# Altium PCB RF Demo.PcbDoc
Units mil, origin at the board's own origin, x right, y up, seen from the top; angles counter-clockwise.
Board outline 1114.53 x 748.46 mil, 2 copper layers (Top Layer, Bottom Layer), stack 11.024 mil thick; 18 components, 17 nets, 60 pads, 78 vias.
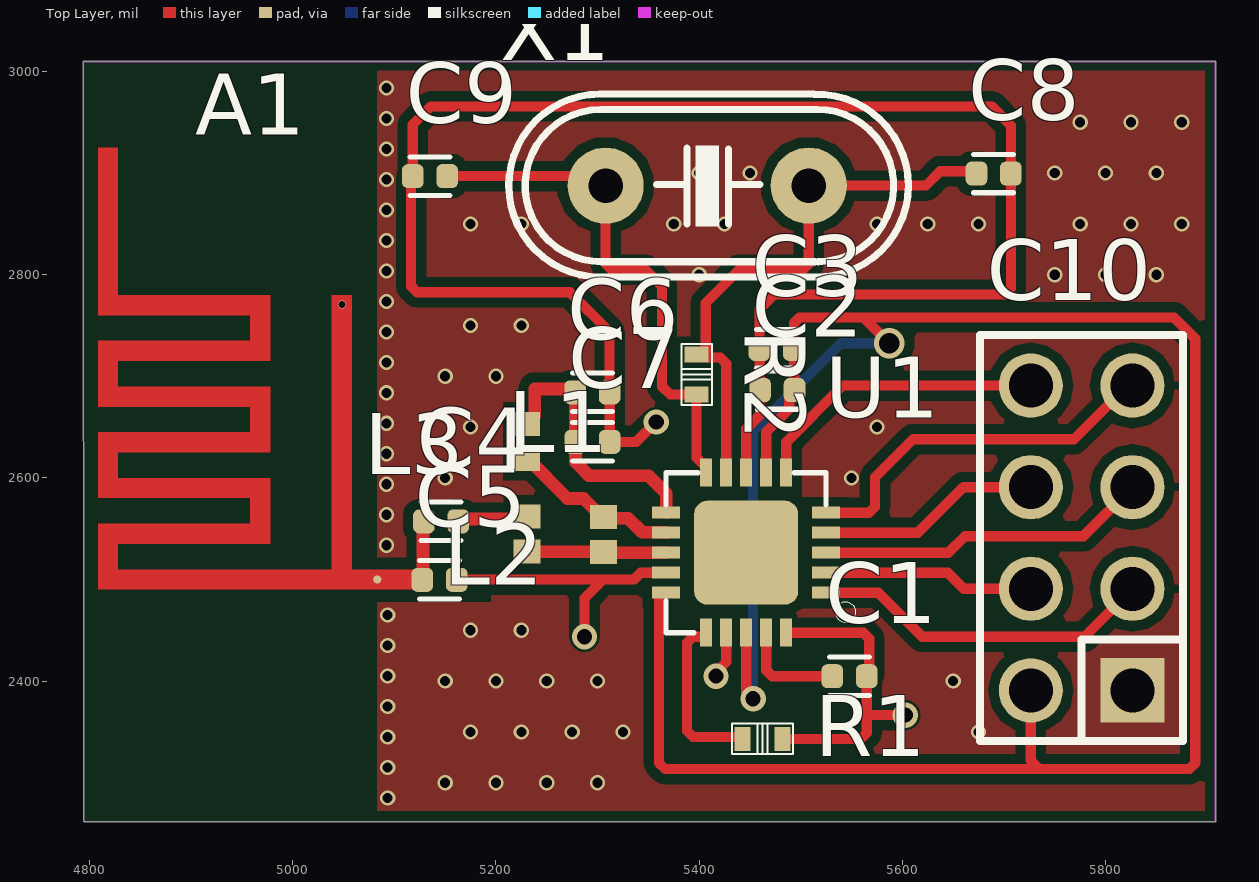
[diagram p0: Top Layer view]
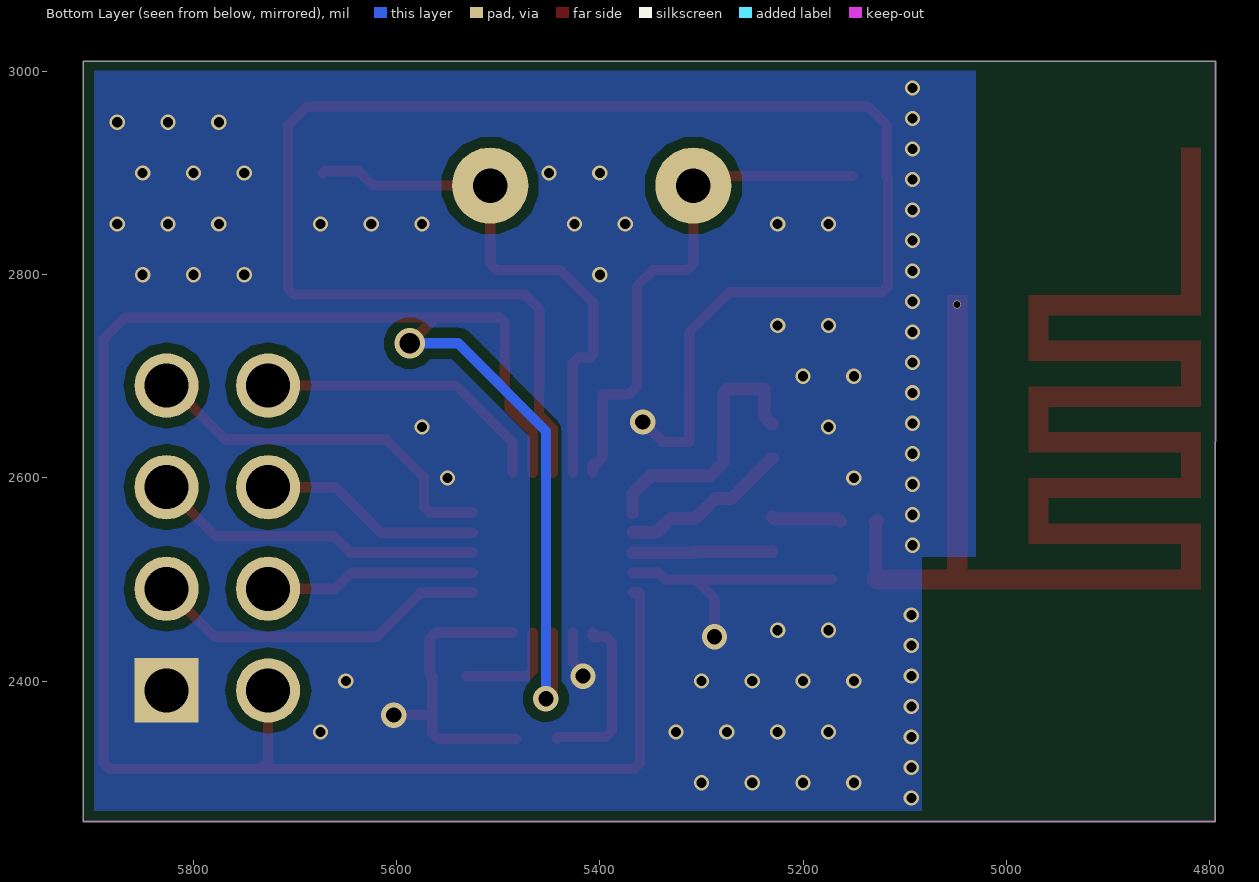
[diagram p1: Bottom Layer view, seen from below]
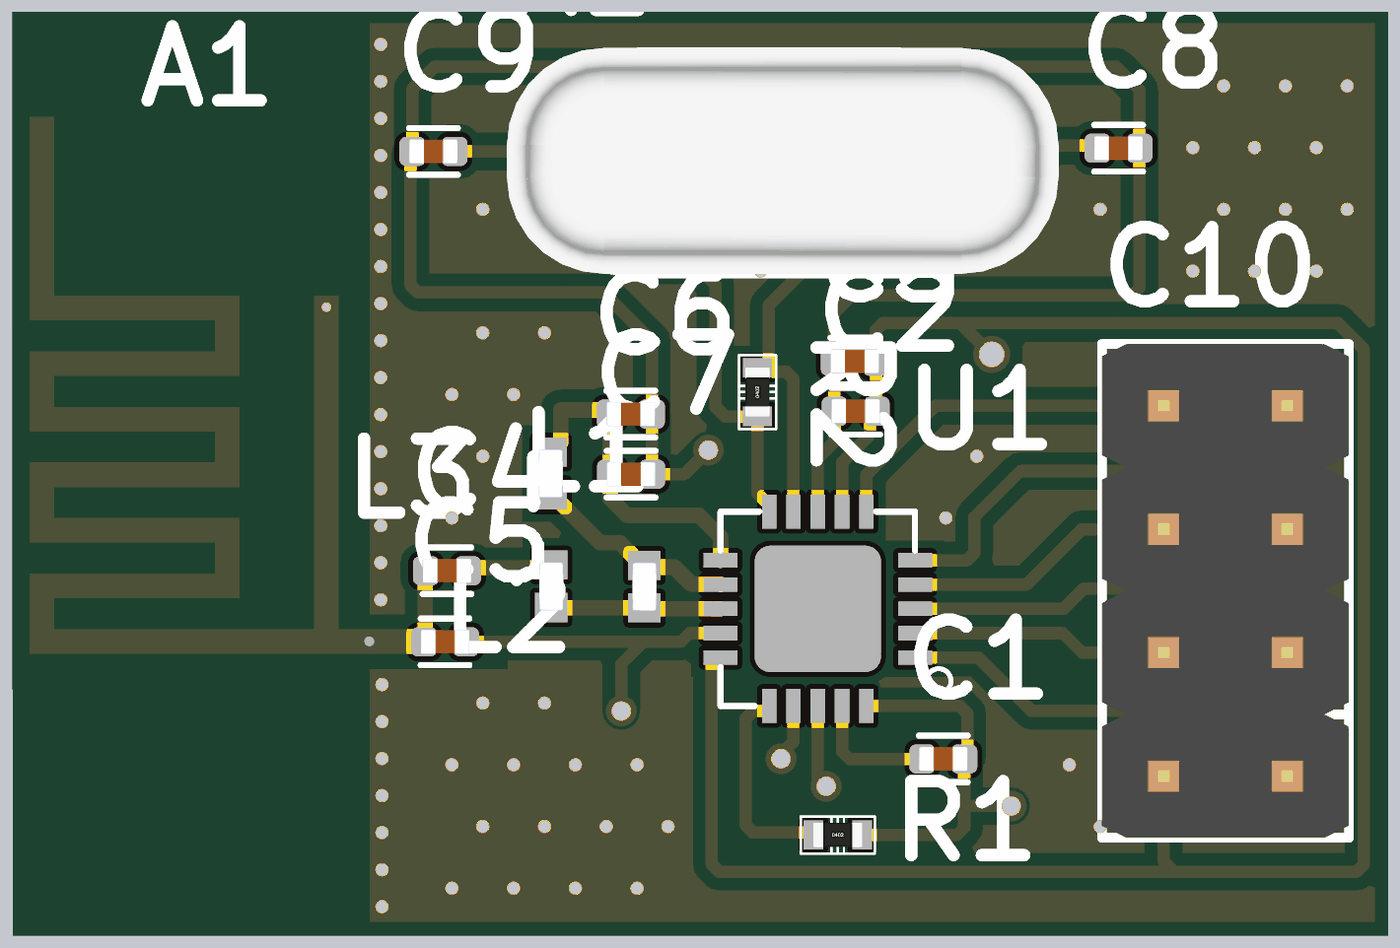
[diagram p2: 3D render of the assembled board from above, using the file's embedded part models]

## Layer stack, top to bottom
Top Solder: solder mask 0.4, Solder Resist, Dk 3.5
Top Layer: signal copper 1.575
Dielectric 1: dielectric 7.874, FR-4, Dk 4.8
Bottom Layer: signal copper 1.575
Bottom Solder: solder mask 0.4, Solder Resist, Dk 3.5

## Board outline
4794.37,2261.58 5907.88,2261.58 5908.39,2262.1 5908.39,3009.52 5907.88,3010.04 4794.37,3010.04 4793.86,3009.52

## Design rules (kind name [scope] priority, off if disabled: settings)
Clearance [All] p1: gap=10 ignorepadtopadclearanceinfootprint=FALSE except(0: Arc-Hole Track-Hole SMDPad-Hole THPad-Hole Via-Hole Fill-Hole Poly-Hole Region-Hole Text-Hole)
PolygonConnect [All] p1: connectstyle=Direct reliefconductorwidth=10 reliefentries=4 polygonreliefangle="90 Angle" airgapwidth=10
RoutingVias [All] p1: holewidth=28 width=35 viastyle="Through Hole" minholewidth=28 minwidth=50 maxholewidth=28 maxwidth=50
SolderMaskExpansion [All] p1: expansion=4 istentingtop=FALSE
Width RF [InNetClass('RF')] p1: maxlimit=12.6 minlimit=12.6 preferedwidth=12.6 impedanceprofiledriven=TRUE impedanceprofileid={A08E1E66-7839-45F7-B785-0C6D9C89D226} impedanceprofilevalue=50.000000 minimp=50.000000 maximp=50.000000 favimp=50.000000 // RF Impedance
Width [All] p2: maxlimit=10 minlimit=10 preferedwidth=10
30 further rules are at their usual default settings.

## Classes and differential pairs
net class RF: NetC4_2 NetC6_1 NetL1_1 NetL2_1 "RF I/O"

## Components (designator, comment, footprint, x,y, rotation, side; value= is the part's Value field where it differs from the comment)
A1 "F Antena" "F Antena NRF24L" 5088.16,2490.03 r90 top net-tie
C1 "33nF" "Capacitor 0402" 5548,2404.76 r0 top value=103
C2 "10nF" "Capacitor 0402" 5476.99,2686.48 r0 top value=103
C3 "10nF" "Capacitor 0402" 5476.32,2727.02 r0 top value=103
C4 "1.5pF" "Capacitor 0402" 5146.09,2557.22 r0 top value=103
C5 "1pF" "Capacitor 0402" 5144.53,2499.61 r0 top value=103
C6 "2.2nF" "Capacitor 0402" 5294.97,2684.16 r0 top value=103
C7 "4.7pF" "Capacitor 0402" 5295.15,2635.45 r0 top value=103
C8 "22pF" "Capacitor 0402" 5689.83,2899.57 r180 top value=103
C9 "22pnF" "Capacitor 0402" 5135.12,2896.98 r0 top value=103
C10 "JP4x2" JP4-D2T 5776.45,2540.87 r90 top
L1 "3.9uH" "Inductor 0402" 5230.47,2544.62 r90 top value="150 mH"
L2 "8.2nH" "Inductor 0402" 5305.98,2544.28 r270 top value="150 mH"
L3 "2.7nH" "Inductor 0402" 5230.04,2636.04 r90 top value="150 mH"
R1 "22k" RES-SMD-0402 5462.49,2343.12 r0 top value="R1/4W - 1K"
R2 "1M" RES-SMD-0402 5397.49,2702 r90 top value="R1/4W - 1K"
U1 "NRF24L01" NRF24l01 5446.32,2526.36 r180 top
X1 "16Mhz" XT2 5407.92,2887.76 r180 top value=4Mhz

## Footprints (in the part's own frame and the unit in brackets; to place one, negate y for a bottom-side part, rotate by r counter-clockwise, add the part's x,y. Pads: shape width x height; smd on the part's side, far side on the other; paste and mask are expansions set on the pad)
"Capacitor 0402" [mm]
  rrect53% 0.54x0.6 smd: 1(-0.431,0) 2(0.429,0)
  silkscreen extent -0.5,-0.48 0.5,0.48, body extent -0.5,-0.25 0.5,0.25, height 0.55
"F Antena NRF24L" [mil]
  round 8 smd mask+4: 1(10,5)
  Top Layer region: 0,0 20,0 20,280 0,280
  Top Layer region: 0,260 65,260 65,280 0,280
  Top Layer region: 45,110 65,110 65,280 45,280
  Top Layer region: 45,110 110,110 110,130 45,130
  Top Layer region: 90,110 110,110 110,280 90,280
  Top Layer region: 90,260 155,260 155,280 90,280
  Top Layer region: 135,110 155,110 155,280 135,280
  Top Layer region: 135,110 200,110 200,130 135,130
  Top Layer region: 180,110 200,110 200,280 180,280
  Top Layer region: 180,260 245,260 245,280 180,280
  Top Layer region: 225,110 245,110 245,280 225,280
  Top Layer region: 225,110 290,110 290,130 225,130
  Top Layer region: 270,110 290,110 290,280 270,280
  Top Layer region: 270,260 435,260 435,280 270,280
  Top Layer region: 0,30 290,30 290,50 0,50
"Inductor 0402" [mm]
  rect 0.6x0.67 smd: 1(-0.437,0) 2(0.437,0)
  body extent -0.5,-0.25 0.5,0.25, height 0.25
JP4-D2T [mm] "8 pins, dual pin, straight, gold plating"
  rect 1.61x1.6 hole 1.1: 1(-3.81,-1.27)
  oval 1.61x1.6 hole 1.1: 2(-1.27,-1.27) 3(1.27,-1.27) 4(3.81,-1.27) 5(3.81,1.27) 6(1.27,1.27) 7(-1.27,1.27) 8(-3.81,1.27)
  silkscreen extent -5.08,-2.54 5.08,2.54, body extent -5.08,-2.54 5.08,2.54, height 8.55
NRF24l01 [mm]
  rect 0.7x0.3 smd: 1(-2,1) 2(-2,0.5) 3(-2,0) 4(-2,-0.5) 5(-2,-1) 11(2,-1) 12(2,-0.5) 13(2,0) 14(2,0.5) 15(2,1)
  rect 0.3x0.7 smd: 6(-1,-2) 7(-0.5,-2) 8(0,-2) 9(0.5,-2) 10(1,-2) 16(1,2) 17(0.5,2) 18(0,2) 19(-0.5,2) 20(-1,2)
  rrect25% 2.6x2.6 smd: PAD(0,0)
  silkscreen extent -2.74,-2 2,2
RES-SMD-0402 [mm]
  rect 0.4x0.6 smd: 1(-0.5,0) 2(0.5,0)
  silkscreen extent -0.76,-0.38 0.76,0.38, body extent -0.5,-0.25 0.5,0.25, height 0.35
XT2 [mil] "Footpin for Crystal 2 pin"
  round 75 hole 34: 1(-100,0) 2(100,0)
  silkscreen extent -198,-90 195,90, body extent -233,-93 213,90, height 138

## Part data
A1: "F Antena MIFA"
C1 C2 C3 C4 C5 C6 C7 C8 C9: library part CM, "Cap SMD"
C10: "WR-PHD 2.54 mm Dual Socket Header", Manufacturer="W¨¹rth Elektronik eiSos GmbH", partNo=61300821821, ComponentLink1 Description=Manufacturer, ComponentLink1URL=http://www.we-online.com, ComponentLink2 Description=Datasheet, ComponentLink2URL=http://katalog.we-online.de/em/datasheet/6130xx21821.pdf, Created by="Karrer Zheng", Created Date="29 March 2013", NoPins=08
L1 L2 L3: library part L1, "Inductor"
R1 R2: library part R, "Resistor 1/4W"
X1: library part XT2, "Crystal For all Crystal 2pin."

## Via types
v1: diameter 15, hole 10, Top Layer to Bottom Layer, tented both sides, 71 vias
v2: diameter 25, hole 15, Top Layer to Bottom Layer, tented both sides, 5 vias
v3: diameter 8, hole 7, Top Layer to Bottom Layer, tented both sides, 1 vias
v4: diameter 30, hole 20, Top Layer to Bottom Layer, tented both sides, 1 vias

## Nets (pads, with @x,y where several pads share a name; then routed paths per layer and width w, separated by ;. In a path a pad name is that pad's centre, name@x,y a point inside that pad or via, vN(x,y) a via of type N, cw(c..) or ccw(c..) an arc to the next point about the centre after c; other vN are vias at no path point)
3.3V: C2.2 C3.2 C10.8 U1.7 U1.15 U1.18 | length 2308.1
  Top Layer w10: U1.15 5361.36,2486.99 5360.45,2486.08 5360.45,2319.27 5366.31,2313.41 5734.88,2313.41 ; U1.18 5446.32,2389.41 v2(5453.1,2382.63) ; U1.7 5466.01,2645.14 5488.64,2667.77 5488.64,2681.27 C2.2 5493.54,2686.84 5493.54,2726.7 C3.2 5493.2,2752.17 5499.06,2758.02 5561.65,2758.02 ; v4(5587.16,2732.51) 5561.65,2758.02 ; C10.8 5726.45,2321.84 5734.88,2313.41 ; 5561.65,2758.02 5867.27,2758.02 5888.35,2736.95 5888.35,2319.27 5882.49,2313.41 5734.88,2313.41
  Bottom Layer w10: v2(5453.1,2382.63) 5453.1,2646.15 5539.47,2732.51 v4(5587.16,2732.51)
CE: C10.2 U1.1 | length 338.9
  Top Layer w10: U1.1 5576.25,2486.99 5619.56,2443.67 5779.25,2443.67 C10.2
CSN: C10.7 U1.2 | length 207.9
  Top Layer w10: U1.2 5644.67,2506.68 5660.48,2490.87 C10.7
GND: C1.2 C2.1 C3.1 C5.2 C6.2 C7.2 C8.1 C9.1 C10.1 R1.2 U1.8 U1.14 U1.17 U1.20 | length 2334.4
  Top Layer w10: C5.2@5171.55,2499.87 5305.35,2499.87 ; v2(5287.15,2443.59) 5287.15,2481.67 5305.35,2499.87 ; v2(5357.66,2654.99) 5338.15,2635.47 C7.2 5311.94,2635.56 5311.94,2684.09 C6.2 5311.85,2743.54 5272.63,2782.77 5122.34,2782.77 5116.49,2788.62 5116.49,2895.33 C9.1 5118.15,2947.8 5136.03,2965.68 5687.95,2965.68 5706.8,2946.83 C8.1 5706.8,2786.28 5700.94,2780.42 5473.63,2780.42 5459.35,2766.13 C3.1 5459.68,2726.7 5459.68,2686.84 C2.1 5460.02,2662.22 5446.32,2648.52 U1.8 ; U1.14 5342.52,2506.68 5335.71,2499.87 5305.35,2499.87 ; v2(5416.56,2404.92) 5416.56,2408.77 5426.64,2418.84 U1.17 ; R1.2 5559.03,2343.12 5564.89,2348.98 5564.89,2364.58 ; U1.20 5561.49,2447.62 5567.35,2441.76 5567.35,2407.24 C1.2 5564.89,2364.58 ; v2(5602.92,2366.57) 5566.88,2366.57 5564.89,2364.58
  other v1: 5093.4,2285.04 5150,2300 5200,2300 5250,2300 5300,2300 5093.4,2315.04 5093.4,2345.04 5175,2350 5225,2350 5275,2350 5325,2350 5675,2350 5093.4,2375.04 5150,2400 5200,2400 5250,2400 5300,2400 5650,2400 5093.4,2405.04 5093.4,2435.04 5175,2450 5225,2450 5093.4,2465.04 5093.4,2465.04 5092.37,2533.7 5092.37,2533.7 5092.37,2563.7 5092.37,2593.7 5150,2600 5550,2600 5092.37,2623.7 5175,2650 5575,2650 5092.37,2653.7 5092.37,2683.7 5150,2700 5200,2700 5092.37,2713.7 5092.37,2743.7 5175,2750 5225,2750 5092.37,2773.7 5400,2800 5750,2800 5800,2800 5850,2800 5092.37,2803.7 5092.37,2833.7 5175,2850 5225,2850 5375,2850 5425,2850 5575,2850 5625,2850 5675,2850 5775,2850 5825,2850 5875,2850 5092.37,2863.7 5092.37,2893.7 5400,2900 5450,2900 5750,2900 5800,2900 5850,2900 5092.37,2923.7 5775,2950 5825,2950 5875,2950 5092.37,2953.7 5092.37,2983.7
  other v3: 5048.37,2770.77
IRQ: C10.5 U1.6 | length 293.8
  Top Layer w10: U1.6 5485.69,2635.07 5541.49,2690.87 C10.5
MISO: C10.4 U1.5 | length 370.2
  Top Layer w10: U1.5 5567.19,2565.73 5573.04,2571.59 5573.04,2600.62 5610.44,2638.02 5768.96,2638.02 5821.82,2690.87 C10.4
MOSI: C10.6 U1.4 | length 220
  Top Layer w10: U1.4 5615.23,2546.05 5660.06,2590.87 C10.6
NetC1_1: C1.1 U1.19 | length 104.4
  Top Layer w10: U1.19 5466.01,2410.68 5471.9,2404.78 C1.1
NetC4_2: C4.2 L1.2 | length 69.4
  Top Layer w12.6: C4.2 5165.27,2559.54 5228.18,2559.54 L1.2
NetC6_1: C6.1 C7.1 L3.2 U1.11 | length 269.4
  Top Layer w12.6: L3.2 5231.42,2653.25 5236.93,2658.76 5236.93,2660.14 5238.23,2661.44 5238.23,2687.47 5274.71,2687.47 C6.1 5278.09,2684.09 5278.09,2635.56 C7.1 ; C7.1 5278.17,2615.65 5291.63,2602.19 5350.09,2602.19 5367.58,2584.7 U1.11
NetC8_2: C8.2 R2.2 U1.9 X1.1 | length 548.2
  Top Layer w10: U1.9 5426.64,2712.66 5420.78,2718.52 5409.4,2718.52 5406.52,2721.39 5406.52,2772.12 5439.2,2804.79 5502.06,2804.79 5507.92,2810.65 X1.1 5623.35,2887.76 5637.36,2901.77 5670.73,2901.77 C8.2
NetC9_2: C9.2 R2.1 U1.10 X1.2 | length 520.3
  Top Layer w10: C9.2 5298.69,2897 X1.2 5307.92,2810.54 5313.78,2804.68 5347.54,2804.68 5363.34,2788.88 5363.34,2690.23 5371.55,2682.02 R2.1@5397.49,2682.02 ; R2.1 R2.1@5397.49,2682.02 ; U1.10 5406.95,2612.97 5406.05,2613.88 5403.35,2613.88 5397.49,2619.74 R2.1@5397.49,2682.02
NetL1_1: L1.1 L2.2 U1.13 | length 137.6
  Top Layer w12.6: L1.1 5230.64,2527.25 5305.8,2527.25 L2.2 5306.69,2526.36 U1.13
NetL2_1: L2.1 L3.1 U1.12 | length 167.7
  Top Layer w12.6: L3.1 5231.42,2618.84 5270.39,2579.87 5286.21,2579.87 5304.6,2561.48 L2.1 5307.19,2560.27 5330.07,2560.27 5343.9,2546.44 5367.19,2546.44 U1.12
NetR1_1: R1.1 U1.16 | length 169.7
  Top Layer w10: U1.16 5406.95,2444.57 5406.05,2443.67 5393.88,2443.67 5388.02,2437.81 5388.02,2350.96 5393.88,2345.1 5440.82,2345.1 R1.1
"RF I/O": A1.1 C4.1 C5.1 | length 102.9
  Top Layer w12.6: C4.1@5126.36,2558.3 C4.1@5126.84,2557.82 ; C5.1 5128.34,2500.4 5128.34,2556.46 C4.1
  Top Layer w20: A1.1 C5.1@5127.16,2500.03
SCK: C10.3 U1.3 | length 328.1
  Top Layer w10: U1.3 5645.32,2526.36 5661.59,2542.63 5778.21,2542.63 C10.3
pads on no net: U1.PAD

## Polygon pours and split planes (outlines as drawn)
GND on Bottom Layer "NONET_L-01_P-001" (solid, pour order 5): 5029.84,2522.17 5082.91,2522.17 5083.61,2522.87 5083.61,3000.62 5029.84,3000.62
GND on Bottom Layer "NONET_L-01_P-001" (solid, pour order 0): 5083.37,3000.86 5897.5,3000.86 5897.5,2286.74 5897.5,2272.6 5886.19,2272.6 5083.37,2272.6
GND on Top Layer "NONET_L-01_P-001" (solid, pour order 2): 5083.37,3000.86 5897.5,3000.86 5897.5,2272.6 5083.37,2272.6

## Keep-outs
Keep-Out Layer:
  lines w1: 4794.37,2262.1 4794.37,3009.52 5907.88,3009.52 5907.88,2262.1 4794.37,2262.1

## Other copper
Top Layer:
  pour cut-out: 5083.39,2522.04 5195.27,2522.04 5195.27,2477.72 5083.07,2477.72